# EAGLE board nanonode-xmega-proto (EAGLE 5.10)
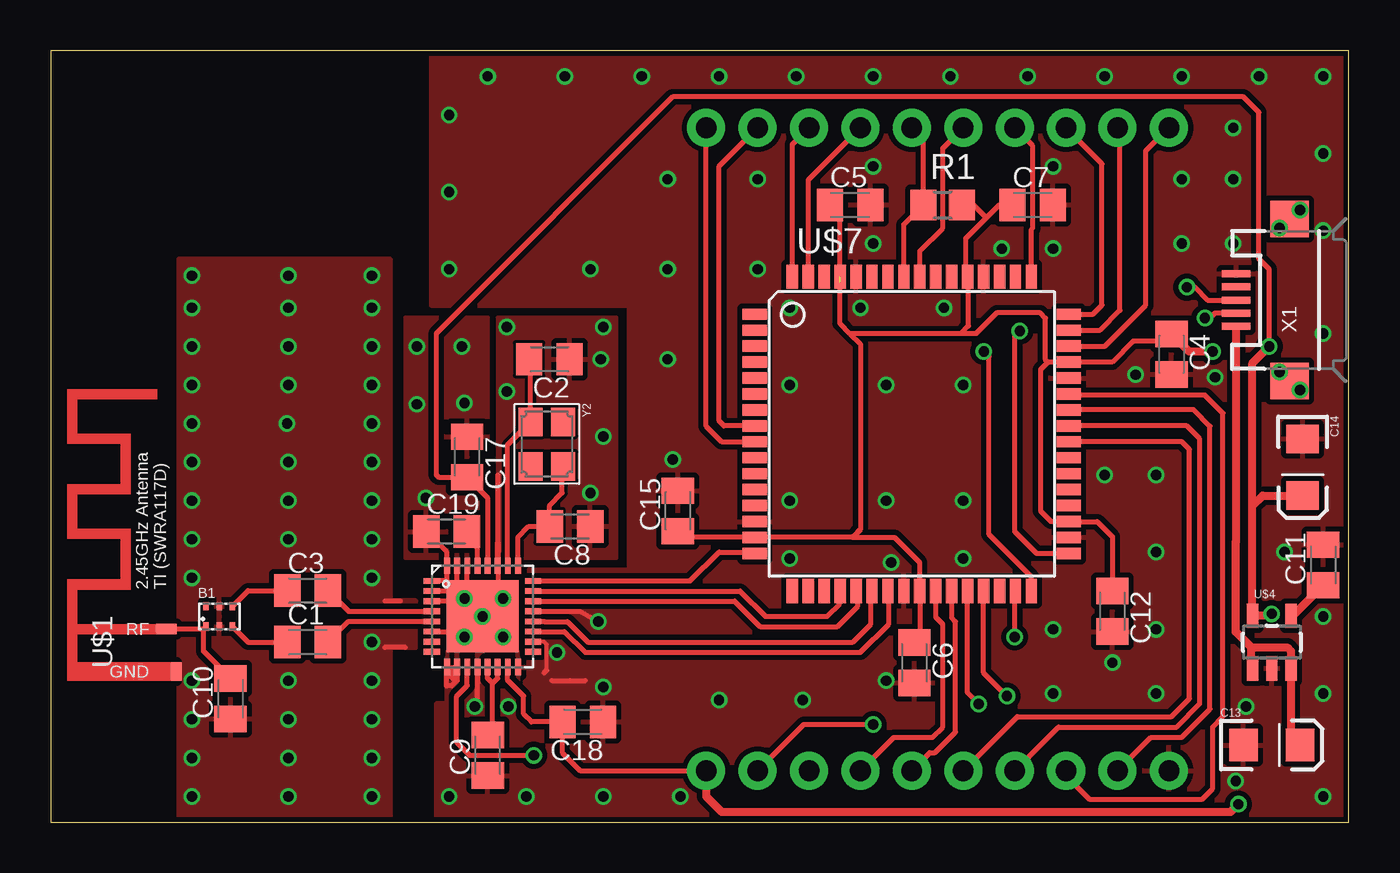
[diagram p0: board, top side]
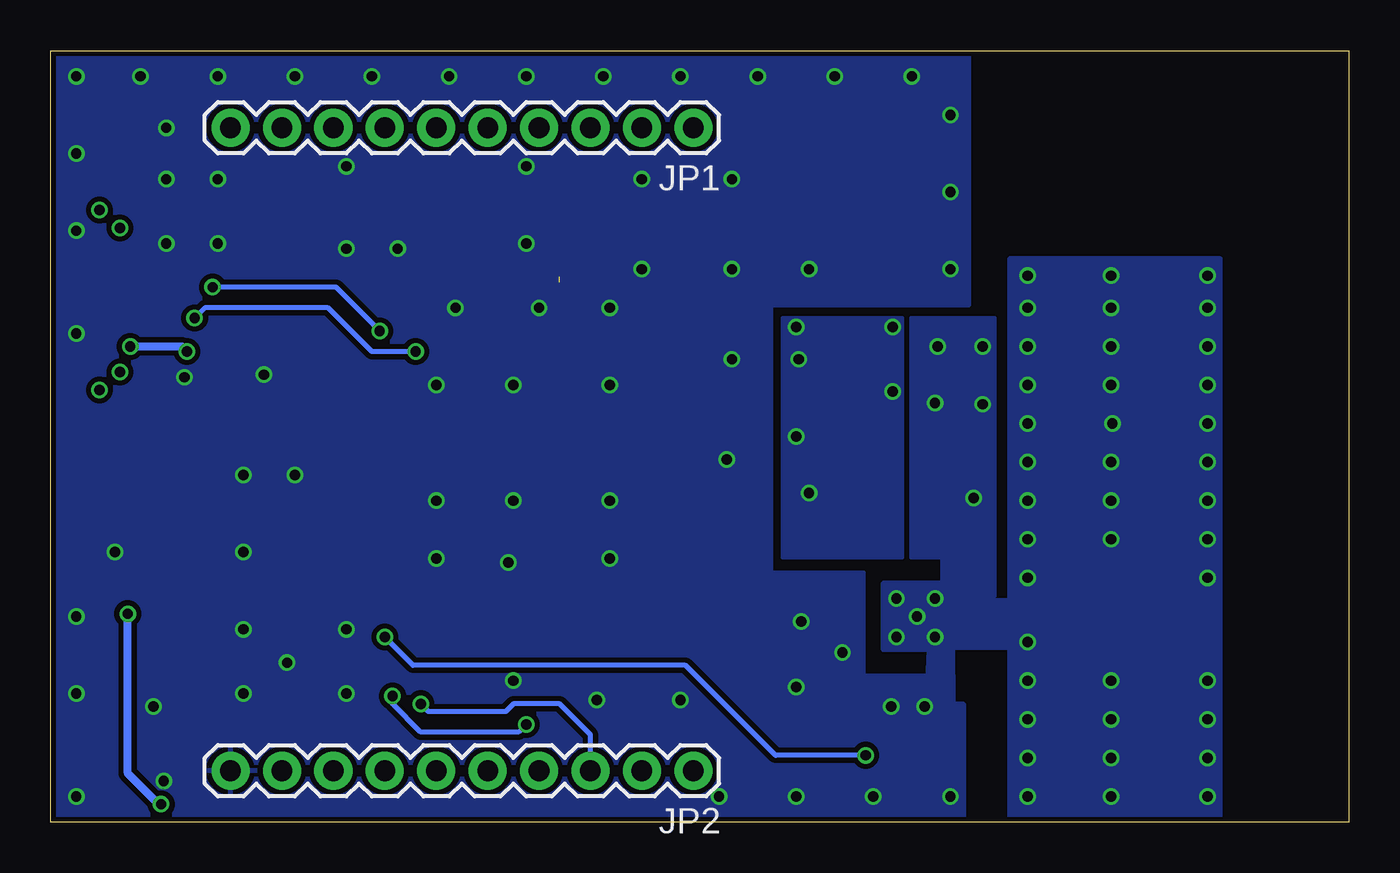
[diagram p1: board, bottom side, seen from below]

Size 64.14 x 38.1 mm. Coordinates in mm from the lower left corner, seen from the top.
Outline: 64.14,38.1 0,38.1 0,0 64.14,0 64.14,38.1
Copper layers (1*16): Top 0.035mm / dielectric 1.5mm / Bottom 0.035mm
Design rules "Fusion_eagle_rule_v1.1": minimum track width 6mil, minimum drill 12mil, track to track 6mil, track to pad 6mil, pad to pad 6mil, via to via 6mil, smd to smd 0mil, copper to edge 10mil, drill to drill 10mil, minimum pad ring 10mil, minimum via ring 6mil, stop-mask expansion 2mil, vias tented up to drill 100mil, thermal gap 10mil

## Footprints (pad centres in the part's own frame; a part is rotated, then mirrored left to right if it is on the bottom)
BALUN = smd 0.27 x 0.4: 1 -0.7,-0.5; 2 -0.05,-0.5; 3 0.6,-0.5; 4 0.6,0.5; 5 -0.05,0.5; 6 -0.7,0.5
C0805K = smd 1.3 x 1.6: 1 -1,0; 2 1,0
EIA3216 = smd 1.4 x 1.6: A 1.4,0; C -1.4,0
1X10 = drill 1.016 pad 1.88 round: 1 0,0; 2 2.54,0; 3 5.08,0; 4 7.62,0; 5 10.16,0; 6 12.7,0; 7 15.24,0; 8 17.78,0; 9 20.32,0; 10 22.86,0
R0805 = smd 1.3 x 1.5: 1 -0.95,0; 2 0.95,0
SWRA117D_LEFT = smd 0.9 x 0.508: GND 0.45,0 | smd 0.508 x 1.016: RF 2.55,0.51
SOT23-5 = smd 0.55 x 1.2: 1 -0.95,-1.3; 2 0,-1.3; 3 0.95,-1.3; 4 0.95,1.3; 5 -0.95,1.3
QFN-32 = smd 3.556 x 3.556: GND 0,0 | smd 0.285 x 0.8: P$1 -1.75,-2.5; P$2 -1.25,-2.5; P$3 -0.75,-2.5; P$4 -0.25,-2.5; P$5 0.25,-2.5; P$6 0.75,-2.5; P$7 1.25,-2.5; P$8 1.75,-2.5; P$17 1.75,2.5; P$18 1.25,2.5; P$19 0.75,2.5; P$20 0.25,2.5; P$21 -0.25,2.5; P$22 -0.75,2.5; P$23 -1.25,2.5; P$24 -1.75,2.5 | smd 0.8 x 0.285: P$9 2.5,-1.75; P$10 2.5,-1.25; P$11 2.5,-0.75; P$12 2.5,-0.25; P$13 2.5,0.25; P$14 2.5,0.75; P$15 2.5,1.25; P$16 2.5,1.75; P$25 -2.5,1.75; P$26 -2.5,1.25; P$27 -2.5,0.75; P$28 -2.5,0.25; P$29 -2.5,-0.25; P$30 -2.5,-0.75; P$31 -2.5,-1.25; P$32 -2.5,-1.75
TQFP64 = smd 1.194 x 0.559: 1 -7.76,5.905; 2 -7.76,5.118; 3 -7.76,4.331; 4 -7.76,3.543; 5 -7.76,2.756; 6 -7.76,1.968; 7 -7.76,1.181; 8 -7.76,0.394; 9 -7.76,-0.394; 10 -7.76,-1.181; 11 -7.76,-1.968; 12 -7.76,-2.756; 13 -7.76,-3.543; 14 -7.76,-4.331; 15 -7.76,-5.118; 16 -7.76,-5.905; 33 7.76,-5.905; 34 7.76,-5.118; 35 7.76,-4.331; 36 7.76,-3.543; 37 7.76,-2.756; 38 7.76,-1.968; 39 7.76,-1.181; 40 7.76,-0.394; 41 7.76,0.394; 42 7.76,1.181; 43 7.76,1.968; 44 7.76,2.756; 45 7.76,3.543; 46 7.76,4.331; 47 7.76,5.118; 48 7.76,5.905 | smd 0.559 x 1.194: 17 -5.905,-7.76; 18 -5.118,-7.76; 19 -4.331,-7.76; 20 -3.543,-7.76; 21 -2.756,-7.76; 22 -1.968,-7.76; 23 -1.181,-7.76; 24 -0.394,-7.76; 25 0.394,-7.76; 26 1.181,-7.76; 27 1.968,-7.76; 28 2.756,-7.76; 29 3.543,-7.76; 30 4.331,-7.76; 31 5.118,-7.76; 32 5.905,-7.76; 49 5.905,7.76; 50 5.118,7.76; 51 4.331,7.76; 52 3.543,7.76; 53 2.756,7.76; 54 1.968,7.76; 55 1.181,7.76; 56 0.394,7.76; 57 -0.394,7.76; 58 -1.181,7.76; 59 -1.968,7.76; 60 -2.756,7.76; 61 -3.543,7.76; 62 -4.331,7.76; 63 -5.118,7.76; 64 -5.905,7.76
USB-MICROB = smd 0.35 x 1.4: D+ 0,2.65; D- -0.65,2.65; GND 1.3,2.65; ID 0.65,2.65; VBUS -1.3,2.65 | smd 1.8 x 1.9: MT1 -4,0; MT2 4,0
CRYSTAL_3.2X2.5 = smd 1.4 x 1.2: 1 -1.1,-0.8; 2 1.1,0.8; GND1 -1.1,0.8; GND2 1.1,-0.8

## Placement (x,y rotation side)
B1  BALUN0805  [BALUN]  8.38,10.16 0 top
C1  22pF  [C0805K]  12.7,8.89 0 top
C2  22pF  [C0805K]  24.64,22.86 180 top
C3  22pF  [C0805K]  12.7,11.43 0 top
C4  0.1uF  [C0805K]  55.37,23.11 270 top
C5  0.1uF  [C0805K]  39.5,30.48 0 top
C6  0.1uF  [C0805K]  42.67,7.87 270 top
C7  0.1uF  [C0805K]  48.51,30.48 0 top
C8  22pF  [C0805K]  25.65,14.61 180 top
C9  0.1uF  [C0805K]  21.59,3.3 90 top
C10  0.47pF  [C0805K]  8.89,6.1 90 top
C11  470pF  [C0805K]  62.87,12.7 90 top
C12  0.1uF  [C0805K]  52.45,10.41 270 top
C13  10uF  [EIA3216]  60.33,3.81 0 top
C14  10uF  [EIA3216]  61.85,17.53 270 top
C15  0.1uF  [C0805K]  30.99,15.37 90 top
C17  0.1uF  [C0805K]  20.57,18.03 270 top
C18  0.1uF  [C0805K]  26.29,4.95 180 top
C19  0.1uF  [C0805K]  19.56,14.35 0 top
JP1  M10"  [1X10]  32.38,34.29 180 bottom
JP2  M10"  [1X10]  32.38,2.54 180 bottom
R1  1K  [R0805]  44.07,30.48 0 top
U$1  ANTENNA_1LEFT  [SWRA117D_LEFT]  6.22,6.99 90 top
U$4  V_REG_LDOSMD  [SOT23-5]  60.33,8.89 0 top
U$6  AT86RF230  [QFN-32]  21.34,10.16 270 top
U$7  XMEGA-A3TQFP  [TQFP64]  42.55,19.18 0 top
X1  USB-MICROB  [USB-MICROB]  61.21,25.78 90 top
Y2  16MHz  [CRYSTAL_3.2X2.5]  24.51,18.67 270 top

## Library data of the parts
B1 C13 C14 JP1 JP2 U$4 X1 = sparkfun
C1-C12 C15 C17-C19 R1 = rcl
U$1 = ant-planar-1
U$6 = custom
U$7 = avr-7
Y2 = nonolith

## Nets
3.3V: C4.1 C5.1 C6.1 C7.1 C12.1 C14.A C15.1 C17.2 C18.2 JP2.1 R1.2 U$4.5 U$6.P$15 U$6.P$28 U$7.15 U$7.25 U$7.35 U$7.45 U$7.53 U$7.61
5V: C13.A U$4.1 U$4.3 X1.VBUS
ADC0: JP1.3 U$7.64
ADC1: JP1.4 U$7.63
D+: U$7.33 X1.D+
D-: U$7.32 X1.D-
DAC0: JP1.2 U$7.8
DAC1: JP1.1 U$7.9
GND: B1.2 B1.5 C2.1 C4.2 C5.2 C6.2 C7.2 C8.1 C9.1 C10.1 C11.2 C12.2 C13.C C14.C C15.2 C17.1 C18.1 C19.1 JP2.10 U$1.GND U$4.2 U$6.GND U$6.P$1 U$6.P$2 U$6.P$3 U$6.P$6 U$6.P$9 U$6.P$10 U$6.P$12 U$6.P$16 U$6.P$18 U$6.P$21 U$6.P$27 U$6.P$30 U$6.P$31 U$6.P$32 U$7.14 U$7.24 U$7.34 U$7.44 U$7.52 U$7.60 X1.GND
IRQ: U$6.P$24 U$7.16
MISO: U$6.P$20 U$7.22
MISO1: JP2.9 U$7.42
MOSI: U$6.P$22 U$7.21
MOSI1: JP2.7 U$7.41
N$1: B1.3 C1.1
N$2: B1.4 C3.1
N$3: C2.2 U$6.P$26 Y2.1
N$4: C8.2 U$6.P$25 Y2.2
N$6: C9.2 U$6.P$13 U$6.P$14
N$8: C19.2 U$6.P$29
N$9: C11.1 U$4.4
N$10: B1.1 C10.2 U$1.RF
PDI: JP1.6 U$7.56
PWM0: JP1.10 U$7.46
PWM1: JP1.9 U$7.47
RFN: C1.2 U$6.P$5
RFP: C3.2 U$6.P$4
RST: JP1.5 R1.1 U$7.57
RX: JP2.3 U$7.28
RX1: JP1.8 U$7.48
SCK: U$6.P$19 U$7.23
SCK1: JP2.8 U$7.43
SCL: JP2.5 U$7.27
SDA: JP2.4 U$7.26
SLP_TR: U$6.P$11 U$7.31
SS: U$6.P$23 U$7.20
SS1: JP2.6 U$7.40
TX: JP2.2 U$7.29
TX1: JP1.7 U$7.49

## Tracks (layer width: path | path; a pad name or v marks a point on that pad's centre or on a via)
3.3V  (via drill 0.51)  (1 unrouted)
  Top 0.254: v60.2,23.5 60.2,27.3 59.69,27.81 59.69,35.05 58.93,35.81 30.73,35.81 19.05,24.13 19.05,17.14 19.16,17.03 C17.2 21.59,16.02 U$6.P$28 | U$6.P$15 22.59,7 23.37,6.22 23.37,5.33 23.75,4.95 C18.2 25.27,4.94 25.27,3.43 26.16,2.54 JP2.1 | C15.1 31.3,14.06 U$7.15 39.62,14.06 | C6.1 42.94,9.14 U$7.25 42.93,11.43 42.93,12.83 41.69,14.06 39.62,14.06 | C12.1 52.45,14.1 51.7,14.85 U$7.35 49.4,14.86 48.9,15.37 48.9,22.35 49.26,22.72 | C4.1 54.85,23.75 53.47,23.75 52.44,22.72 U$7.45 49.26,22.72 | U$7.61 39,29.98 C5.1 | R1.2 45.59,30.48 46.23,29.84 | 46.23,29.84 46.86,30.48 C7.1 | 38.99,26.67 38.99,24.64 39.5,24.13 | 39.5,24.13 40.01,23.62 40.01,14.48 | 40.01,14.48 39.62,14.1 | 40.01,14.48 40.01,14.44 39.62,14.06 | 44.96,24.13 39.5,24.13 | 44.96,24.13 45.72,24.13 46.74,25.15 48.9,25.15 49.15,24.89 49.15,22.84 49.26,22.72 | 44.96,24.13 45.34,24.51 45.34,26.9 U$7.53 45.21,27.03 45.21,28.83 46.23,29.84
  Top 0.406: 59.38,15.62 U$4.5 60.23,10.19 v60.33,10.29 | 59.38,15.62 59.38,22.67 v60.2,23.5 | C14.A 59.88,16.13 59.38,15.62 | JP2.1 32.38,1.27 33.15,0.51 58.29,0.51 v58.67,0.89 58.42,0.64 | v57.4,23.24 56.24,23.24 C4.1
  Bottom 0.406: v60.2,23.5 57.66,23.5 v57.4,23.24 | v58.67,0.89 58.8,0.89 60.33,2.41 v60.33,10.29
5V
  Top 0.406: 61.27,4.37 arc45 61.35,4.19 C13.A 61.27,4.26 U$4.3 61.27,8.45 61.09,8.64 59.31,8.64 | 59.31,8.64 59.31,7.66 U$4.1 | 59.31,8.64 58.55,9.4 58.55,13.84 58.56,13.86 X1.VBUS
ADC0
  Top 0.254: U$7.64 36.64,33.47 JP1.3
ADC1
  Top 0.254: U$7.63 37.43,31.71 JP1.4
D+  (via drill 0.51)
  Top 0.254: U$7.33 48.7,13.27 47.62,14.35 47.62,24 v47.88,24.26 | v56.13,26.42 56.52,26.42 57.15,25.78 X1.D+
  Bottom 0.254: v47.88,24.26 50.04,26.42 v56.13,26.42
D-  (via drill 0.51)
  Top 0.254: U$7.32 48.45,12.13 46.35,14.22 46.35,22.99 v46.1,23.24 | v57.02,24.89 57.28,24.89 57.53,25.15 58.55,25.15 X1.D-
  Bottom 0.254: v46.1,23.24 48.26,23.24 50.42,25.4 56.52,25.4 v57.02,24.89
DAC0
  Top 0.254: U$7.8 33.26,19.57 33.02,19.81 33.02,32.38 JP1.2
DAC1
  Top 0.254: JP1.1 32.38,19.56 33.15,18.8 34.77,18.8
  Top 0.406: 34.77,18.8 U$7.9
GND  (via drill 0.51)
  Top 0.203: U$6.P$18 24.36,8.91 24.51,8.76 24.51,7.49
  Top 0.254: U$6.P$27 22.09,13.83 22.1,13.84 | 22.1,13.84 22.1,17.14 | U$6.P$12 21.09,6.99 | U$6.P$10 20.07,7.64 | U$6.P$6 20.59,9.41 U$6.GND | 20.59,10.91 U$6.P$3 | U$6.GND 20.59,10.91 | 20.09,11.41 19.94,11.41 | 19.94,11.41 U$6.P$2 | 20.59,10.91 v20.45,11.05 20.09,11.41 | 19.59,11.76 U$6.P$32 19.59,13.32 C19.1 | 19.94,11.41 19.59,11.76 | U$6.P$1 19.44,11.91 19.59,11.76 | 20.09,11.41 U$6.P$31 | 20.59,10.91 U$6.P$30 | U$6.GND 22.1,10.92 | U$6.GND v22.35,9.14 22.59,8.91 | U$6.GND 21.59,10.41 | 22.1,13.84 22.1,11.3 v22.35,11.05 | 24.38,7.37 24.51,7.49 | 25.65,6.99 25.67,6.97 | 24.77,6.99 25.65,6.99 | 25.65,6.99 26.42,6.99 | U$6.P$10 20.09,7.26 | U$6.P$12 21.09,6.86 | U$6.P$21 26.17,10.41 v27.05,9.91 | U$6.P$12 21.09,5.97 v20.95,5.71 | U$6.P$10 20.09,7 19.81,6.73 19.56,6.73 19.56,7.62 | 19.81,7.62 19.81,7.11 19.94,7.11 19.94,7.62 19.98,7.66 U$6.P$10 | 16.51,10.92 17.27,10.92 | 17.53,8.64 16.51,8.64
  other vias: 30.73,17.91 58.55,2.03 62.87,1.27 62.87,24.13 62.87,29.21 41.27,21.59 21.34,10.16 20.45,9.14 6.99,19.68 11.68,19.68 15.88,19.68 6.99,17.78 11.75,17.78 15.88,17.78 6.99,15.88 11.75,15.88 15.88,15.88 6.99,13.97 11.75,13.97 15.88,13.97 6.99,26.99 11.75,26.99 15.88,26.99 15.88,25.4 15.88,23.5 11.75,23.5 6.99,23.5 6.99,25.4 11.75,25.4 6.99,21.59 11.75,21.59 15.88,21.59 6.99,3.17 6.99,1.27 11.75,3.17 11.75,1.27 15.88,3.17 15.88,1.27 40.01,25.4 46.99,28.32 49.53,28.32 53.59,22.1 57.53,21.97 52.45,7.87 18.54,16 20.45,20.7 27.18,22.86 26.67,16.26 41.53,12.83 25.02,8.38 22.61,5.71 27.3,1.27 23.5,1.27 19.68,1.27 31.11,1.27 19.68,27.3 19.68,31.11 19.68,34.92 21.59,36.83 25.4,36.83 29.21,36.83 62.87,36.83 62.87,33.02 62.87,10.16 62.87,6.35 20.32,23.5 26.67,27.3 30.48,27.3 30.48,31.75 30.48,22.86 27.3,19.05 34.92,31.75 34.92,27.3 6.99,6.99 6.99,5.08 11.75,6.99 11.75,5.08 15.88,8.89 15.88,6.99 15.88,5.08 49.53,9.53 49.53,6.35 54.61,6.35 54.61,9.53 54.61,13.34 54.61,17.14 52.07,17.14 59.05,5.71 60.96,13.34 55.88,28.57 55.88,31.75 58.42,28.57 58.42,31.75 58.42,34.29 40.64,32.38 40.64,28.57 49.53,32.38 22.54,24.45 22.54,21.27 27.3,24.45 18.1,23.5 18.1,20.64 36.51,25.4 36.51,21.59 36.51,15.88 36.51,13.02 41.27,15.88 45.09,15.88 45.09,13.02 45.09,21.59 44.13,25.4 33.02,6.03 37.15,6.03 27.3,6.67 41.27,6.99 15.88,12.06 6.99,12.06 33.02,36.83 36.83,36.83 40.64,36.83 44.45,36.83 48.26,36.83 52.07,36.83 55.88,36.83 59.69,36.83
  pour Top (isolate 0.254): 16.76,27.81 16.76,0.25 6.35,0.25 6.35,27.81
  pour Top: 27.94,24.89 22.1,24.89 22.1,13.08 27.94,13.08
  pour Top (isolate 0.254): 64.14,38.1 18.8,38.1 18.8,25.53 28.57,25.53 28.57,12.45 23.62,12.45 23.62,8.38 19.56,8.38 19.56,5.84 19.05,5.84 19.05,0.13 64.14,0.13
  pour Top (isolate 0.254): 21.59,24.89 17.53,24.89 17.53,13.08 21.59,13.08
  pour Bottom (isolate 0.254): 6.35,27.81 16.76,27.81 16.76,10.92 19.94,10.92 19.94,8.64 16.76,8.64 16.76,0.25 6.35,0.25
  pour Bottom (isolate 0.254): 22.99,11.81 19.68,11.81 19.68,8.51 22.99,8.51
  pour Bottom (isolate 0.254): 21.59,24.89 17.53,24.89 17.53,11.18 20.07,11.18 20.07,13.08 21.59,13.08
  pour Bottom (isolate 0.254): 64.01,37.97 18.8,37.97 18.8,25.53 28.57,25.53 28.57,12.32 24,12.32 24,7.24 19.56,7.24 19.56,5.84 19.05,5.84 19.05,0.13 64.01,0.13
  pour Bottom (isolate 0.254): 27.94,24.89 22.1,24.89 22.1,13.08 27.94,13.08
  pour Bottom: 20.7,9.53 19.56,9.53 19.56,6.99 20.83,6.99
  pour Top (isolate 0.254): 16.64,10.92 16.76,8.64 18.03,8.64 18.03,10.92
IRQ
  Top 0.254: U$6.P$24 31.59,11.91 33.02,13.34 34.72,13.34 U$7.16
MISO
  Top 0.254: U$7.22 40.51,11.35 40.51,9.78 39.62,8.89 26.54,8.89 25.53,9.91 24.38,9.91 U$6.P$20
MISO1
  Top 0.254: U$7.42 56.48,20.36 57.28,19.56 57.28,5.59 55.88,4.19 54.36,4.19 JP2.9
MOSI
  Top 0.254: U$6.P$22 33.79,10.91 35.05,9.65 38.86,9.65 39.88,10.67 39.88,11.33 U$7.21 39.75,11.38
MOSI1
  Top 0.254: JP2.7 49.78,4.7 55.63,4.7 56.77,5.84 56.77,18.92 56.12,19.57 U$7.41
N$1
  Top 0.254: C1.1 9.75,8.89 B1.3
N$2
  Top 0.254: C3.1 9.75,11.43 B1.4
N$3
  Top 0.254: U$6.P$26 22.59,18.64 Y2.1 23.71,22.79 C2.2
N$4
  Top 0.254: U$6.P$25 23.09,14.07 23.62,14.61 C8.2 24.65,15.64 25.27,16.26 25.27,17.53 Y2.2
N$5  (via drill 0.51)
  other vias: 60.71,22.23
N$6
  Top 0.254: 21.84,6.86 21.84,4.94 C9.2 | U$6.P$13 21.59,7.11 21.84,6.86 | U$6.P$14 22.09,7.1 21.84,6.86
N$7  (via drill 0.51)
  other vias: 61.72,21.34
N$8
  Top 0.254: U$6.P$29 21.09,13.47 C19.2
N$9
  Top 0.406: 62.67,11.5 C11.1 61.35,10.19 U$4.4
N$10
  Top 0.254: 7.56,9.54 U$1.RF | 7.56,9.54 B1.1 | 7.56,9.54 7.56,8.43 C10.2
N$11  (via drill 0.51)
  other vias: 60.71,29.34
N$12  (via drill 0.51)
  other vias: 61.72,30.23
N$13
  pour Top: 19.81,7.62 19.81,6.99
PDI
  Top 0.254: JP1.6 44.07,33.27 44.07,29.34 42.94,28.21 U$7.56
PWM0
  Top 0.254: U$7.46 52.08,23.51 54.1,25.53 54.1,33.15 JP1.10
PWM1
  Top 0.254: U$7.47 51.85,24.3 52.83,25.27 52.83,34.16 JP1.9
RFN
  Top 0.254: U$6.P$5 14.72,9.91 C1.2
RFP
  Top 0.254: U$6.P$4 14.72,10.41 C3.2
RST
  Top 0.254: U$7.57 42.15,29.51 R1.1 43.12,33.72 JP1.5
RX  (via drill 0.51)
  Top 0.254: U$7.28 45.3,6.39 v45.85,5.84
  Bottom 0.254: v45.85,5.84 45.47,5.46 41.66,5.46 41.27,5.84 38.99,5.84 37.47,4.32 JP2.3
RX1
  Top 0.254: U$7.48 51.5,25.08 51.94,25.53 51.94,32.51 JP1.8
SCK
  Top 0.254: U$6.P$19 25.39,9.41 26.42,8.38 40.01,8.38 41.4,9.78 41.4,11.38 U$7.23
SCK1
  Top 0.254: JP2.8 50.55,2.16 50.55,1.91 51.31,1.14 56.9,1.14 57.4,1.65 57.4,4.7 57.91,5.21 57.91,20.19 57.02,21.08 50.42,21.08 50.35,21.14 U$7.43
SCL
  Top 0.254: U$7.27 44.51,10.1 44.7,9.91 44.7,4.45 43.69,3.43 43.43,3.43 JP2.5
SDA
  Top 0.254: U$7.26 43.73,10.12 44.07,9.78 44.07,4.7 43.56,4.19 41.66,4.19 JP2.4
SLP_TR  (via drill 0.51)
  Top 0.254: U$6.P$11 20.59,6.74 20.07,6.22 20.07,3.94 20.7,3.3 v23.88,3.3 | v47.62,9.14 47.62,11.38 U$7.31
  Bottom 0.254: v23.88,3.3 28.32,3.3 32.77,7.75 46.23,7.75 v47.62,9.14
SS
  Top 0.254: U$6.P$23 34.06,11.41 35.31,10.16 38.35,10.16 38.99,10.79 38.99,11.4 U$7.20
SS1
  Top 0.254: U$7.40 55.89,18.78 56.26,18.41 56.26,6.1 55.37,5.21 47.75,5.21 JP2.6
TX  (via drill 0.51)
  Top 0.254: U$7.29 46.09,7.38 v47.24,6.22 | v40.64,4.83 37.21,4.83 JP2.2
  Bottom 0.254: v47.24,6.22 47.24,5.84 45.85,4.45 41.02,4.45 v40.64,4.83
TX1
  Top 0.254: U$7.49 48.45,29.27 48.51,29.34 48.51,33.4 JP1.7